# EAGLE board Power (EAGLE 9.2.2)
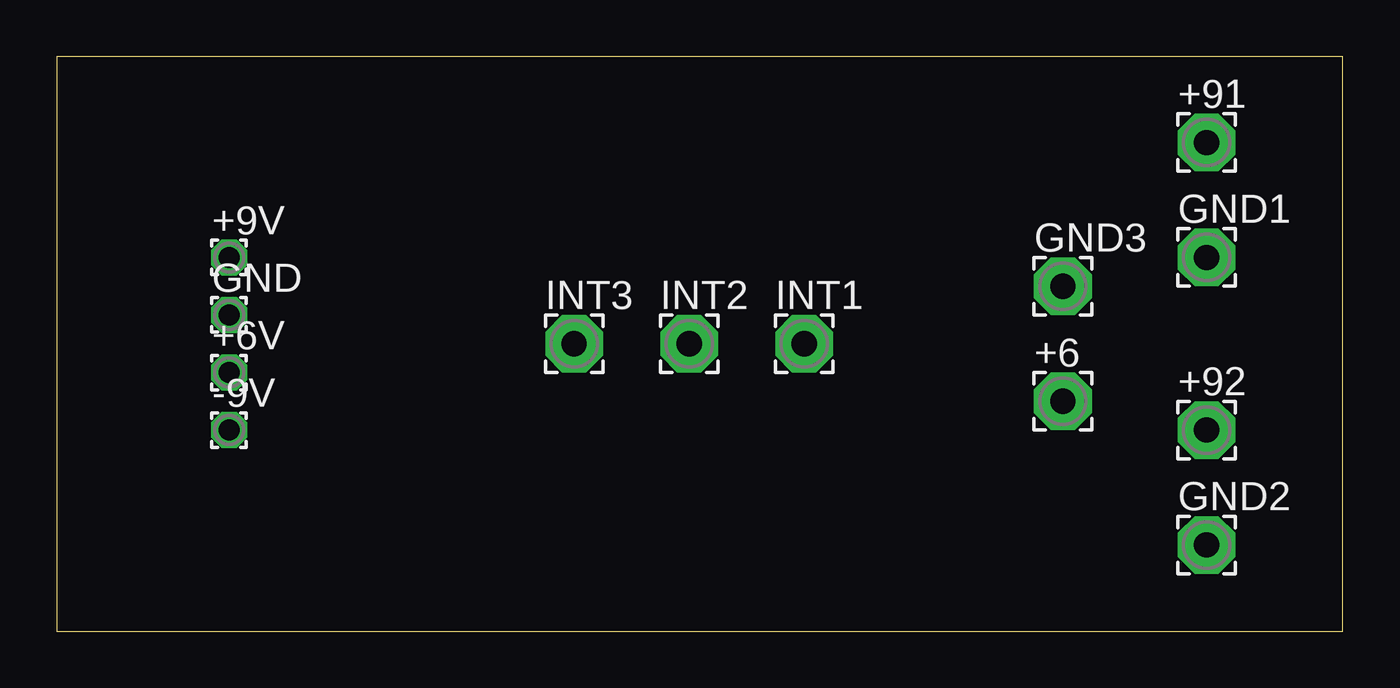
[diagram p0: board, top side]
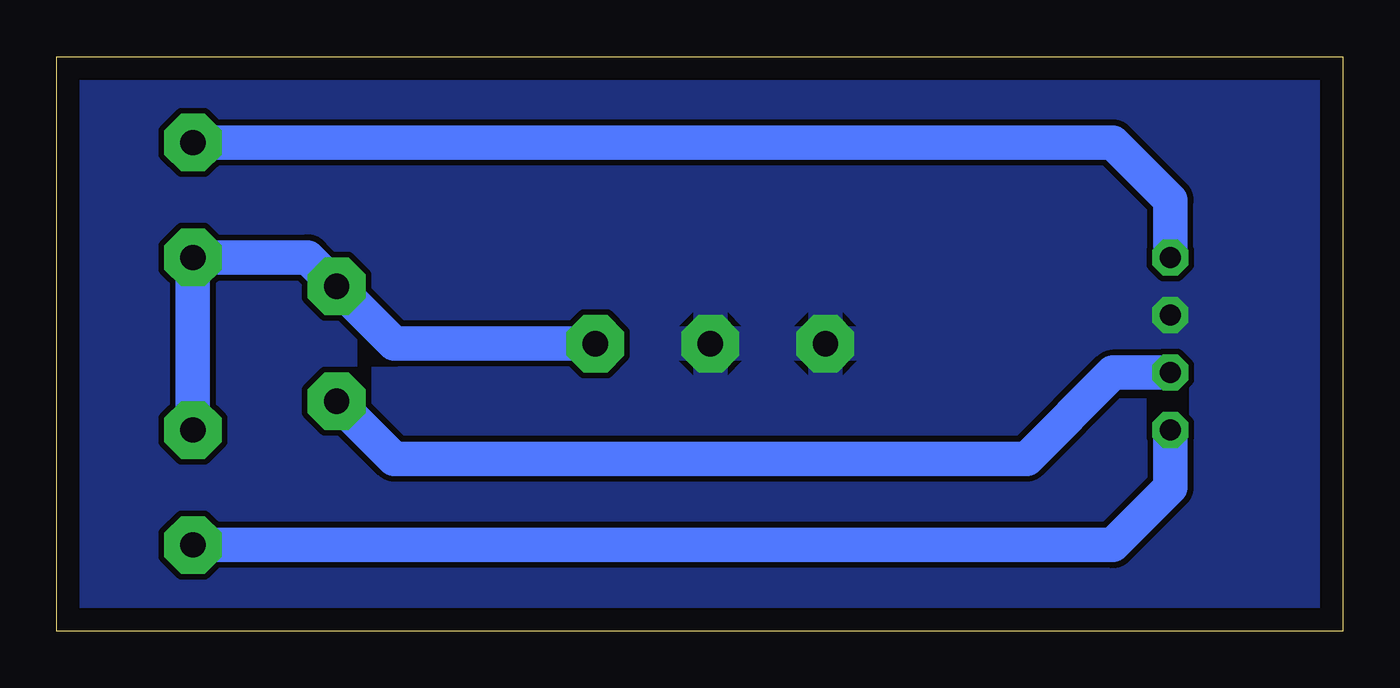
[diagram p1: board, bottom side, seen from below]

Size 56.82 x 25.39 mm. Coordinates in mm from the lower left corner, seen from the top.
Outline: 0,0 56.82,0 56.82,25.39 0,25.39 0,0
Copper layers (1*16): Top 0.035mm / dielectric 1.5mm / Bottom 0.035mm
Design rules "default *": minimum track width 60mil, minimum drill 0.35mm, track to track 10mil, track to pad 10mil, pad to pad 10mil, via to via 10mil, smd to smd 6mil, copper to edge 40mil, drill to drill 6mil, minimum pad ring 10mil, minimum via ring 8mil, stop-mask expansion 4mil, vias tented up to drill 0mil, thermal gap 10mil

## Footprints (pad centres in the part's own frame; a part is rotated, then mirrored left to right if it is on the bottom)
2,54/1,1 = drill 1.118 pad 2.54 octagon: 1 0,0
1,6/0,9 = drill 0.914 pad 1.6 octagon: 1 0,0

## Placement (x,y rotation side)
+6  [2,54/1,1]  44.45,10.16 0 top
+6V  [1,6/0,9]  7.62,11.43 0 top
+9V  [1,6/0,9]  7.62,16.51 0 top
+91  [2,54/1,1]  50.8,21.59 0 top
+92  [2,54/1,1]  50.8,8.89 0 top
-9V  [1,6/0,9]  7.62,8.89 0 top
GND  [1,6/0,9]  7.62,13.97 0 top
GND1  [2,54/1,1]  50.8,16.51 0 top
GND2  [2,54/1,1]  50.8,3.81 0 top
GND3  [2,54/1,1]  44.45,15.24 0 top
INT1  [2,54/1,1]  33.02,12.7 0 top
INT2  [2,54/1,1]  27.94,12.7 0 top
INT3  [2,54/1,1]  22.86,12.7 0 top

## Library data of the parts
+6 +6V +9V +91 +92 -9V GND GND1-GND3 INT1-INT3 = wirepad

## Nets
6POS: +6.1 +6V.1
9NEG: -9V.1 GND2.1
9POS: +9V.1 +91.1
GND: GND.1 INT2.1 INT3.1
NEG123: +92.1 GND1.1 GND3.1 INT1.1

## Tracks (layer width: path | path; a pad name or v marks a point on that pad's centre or on a via)
6POS
  Bottom 1.524: +6V.1 10.16,11.43 13.97,7.62 41.91,7.62 +6.1
9NEG
  Bottom 1.524: -9V.1 7.62,6.35 10.16,3.81 GND2.1
9POS
  Bottom 1.524: +9V.1 7.62,19.05 10.16,21.59 +91.1
GND
  pour Bottom: 0,25.4 57.15,25.4 57.15,0 0,0
NEG123
  Bottom 1.524: +92.1 GND1.1 45.72,16.51 GND3.1 41.91,12.7 INT1.1